# EAGLE board bugs (EAGLE 9.1.1)
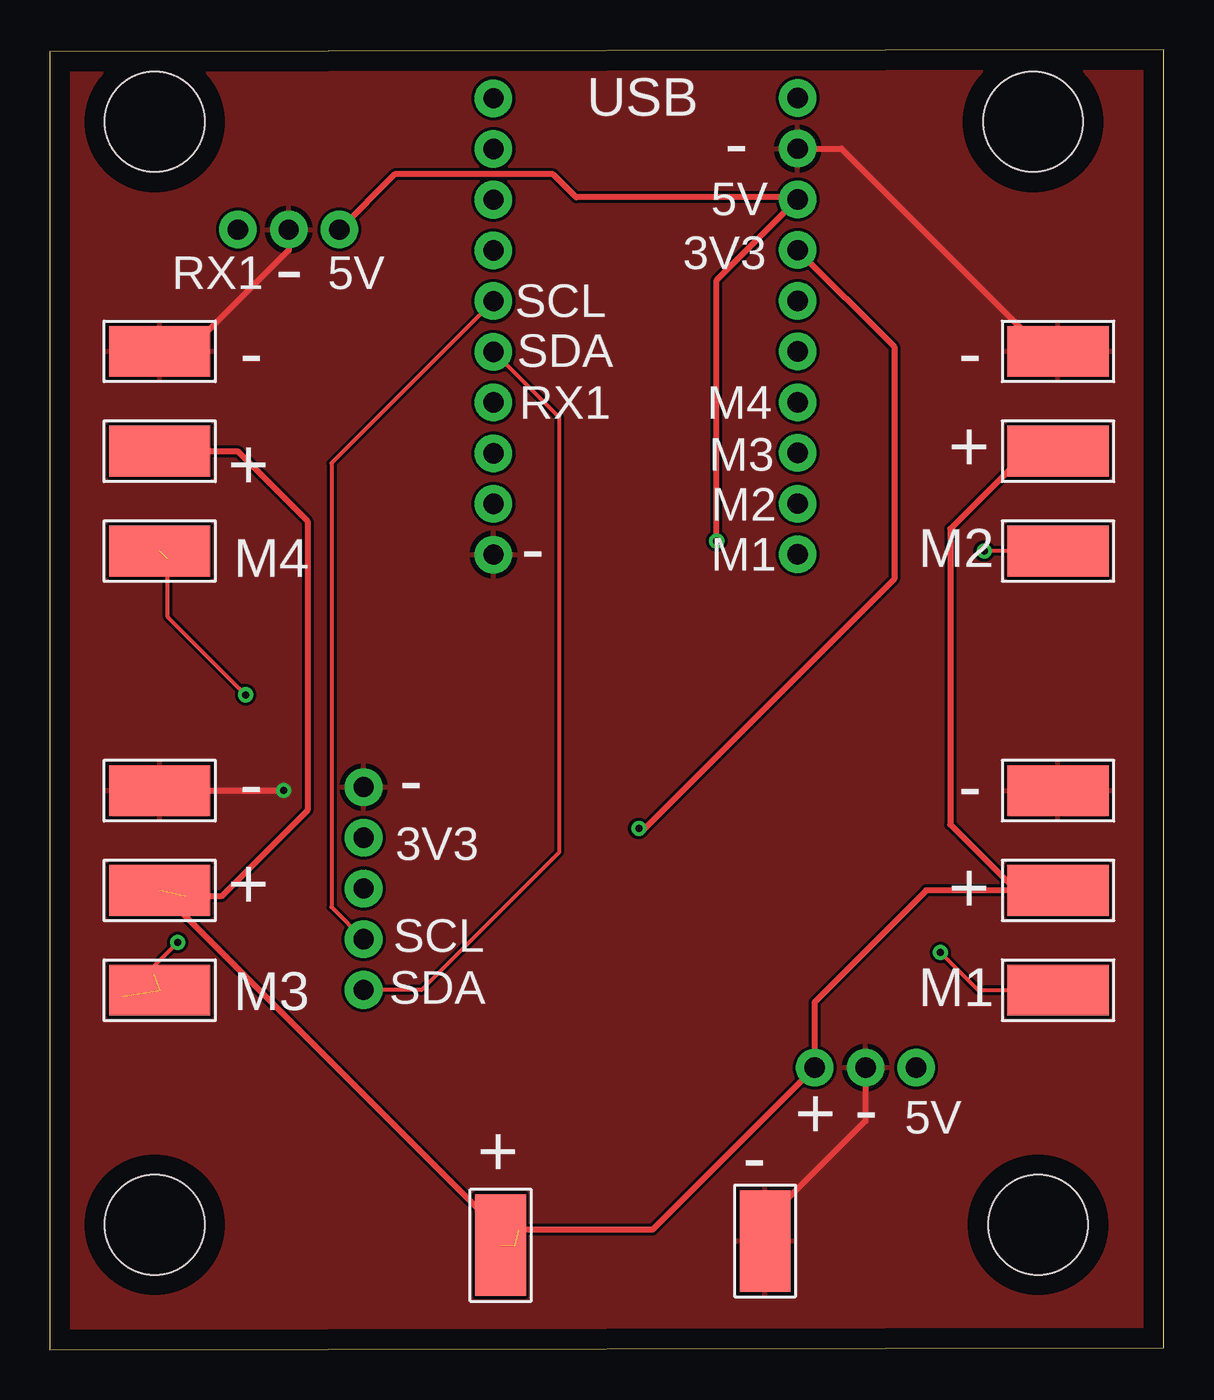
[diagram p0: board, top side]
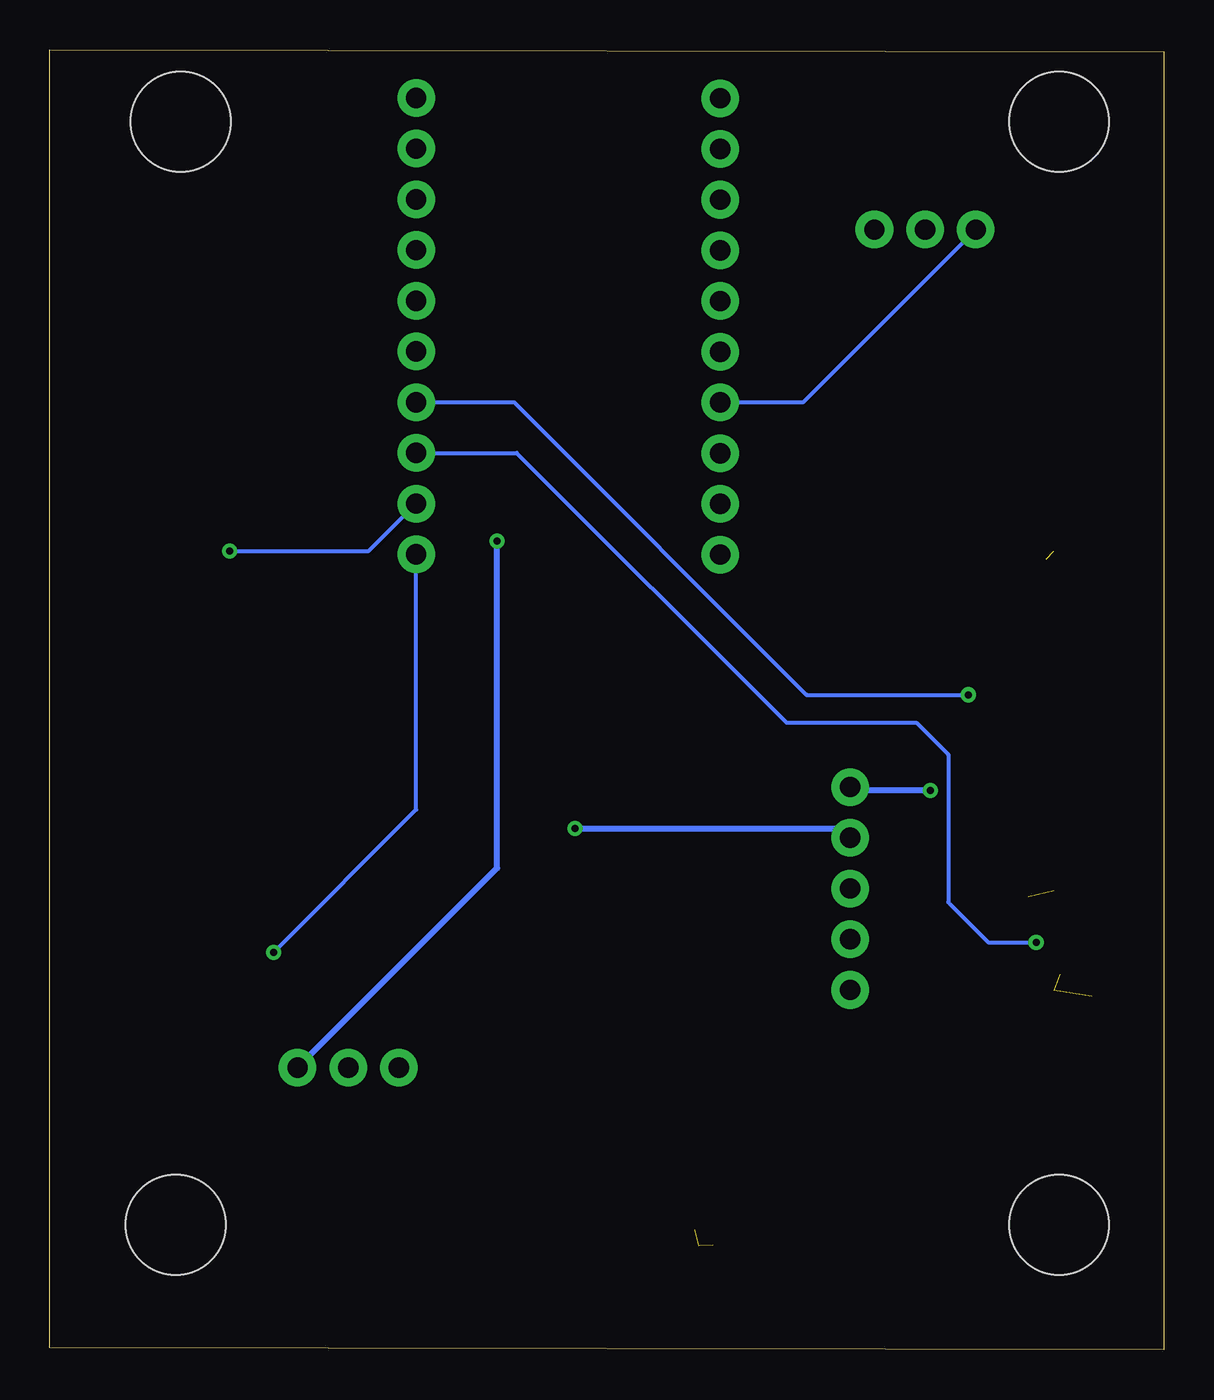
[diagram p1: board, bottom side, seen from below]

Size 55.8 x 65.1 mm. Coordinates in mm from the lower left corner, seen from the top.
Outline: 0,0 55.8,0.1 55.8,65.1 0,65 0,0
Copper layers (1*16): Top 0.035mm / dielectric 1.5mm / Bottom 0.035mm
Design rules "default": minimum track width 6mil, minimum drill 0.35mm, track to track 6mil, track to pad 6mil, pad to pad 6mil, via to via 6mil, smd to smd 6mil, copper to edge 40mil, drill to drill 6mil, minimum pad ring 10mil, minimum via ring 8mil, stop-mask expansion 4mil, vias tented up to drill 0mil, thermal gap 10mil
Holes 5 mm at 5.25,6.25 49.5,6.25 5.25,61.5 49.25,61.5

## Footprints (pad centres in the part's own frame; a part is rotated, then mirrored left to right if it is on the bottom)
5-2,5 = smd 2.54 x 5.08: 1 0,0
1X10_NO_SILK = drill 1.016 pad 1.88: 1 0,0; 2 2.54,0; 3 5.08,0; 4 7.62,0; 5 10.16,0; 6 12.7,0; 7 15.24,0; 8 17.78,0; 9 20.32,0; 10 22.86,0
1X03_NO_SILK = drill 1.016 pad 1.88: 1 0,0; 2 2.54,0; 3 5.08,0
1X05_NO_SILK = drill 1.016 pad 1.88: 1 0,0; 2 2.54,0; 3 5.08,0; 4 7.62,0; 5 10.16,0

## Placement (x,y rotation side)
GND  WIREPADSMD5-2,5  [5-2,5]  35.83,5.44 0 top
GND1  WIREPADSMD5-2,5  [5-2,5]  5.5,50 90 top
GND2  WIREPADSMD5-2,5  [5-2,5]  50.5,28 90 top
GND3  WIREPADSMD5-2,5  [5-2,5]  50.5,50 90 top
GND4  WIREPADSMD5-2,5  [5-2,5]  5.5,28 90 top
J1  [1X10_NO_SILK]  37.46,62.69 270 top
J2  [1X10_NO_SILK]  22.22,62.68 270 top
J3  [1X03_NO_SILK]  43.4,14.13 180 top
J4  [1X05_NO_SILK]  15.71,18.02 90 top
J5  [1X03_NO_SILK]  14.5,56.1 0 bottom
M1  WIREPADSMD5-2,5  [5-2,5]  50.5,18 90 top
M2  WIREPADSMD5-2,5  [5-2,5]  50.5,40 90 top
M3  WIREPADSMD5-2,5  [5-2,5]  5.5,18 90 top
M4  WIREPADSMD5-2,5  [5-2,5]  5.5,40 90 top
VBAT  WIREPADSMD5-2,5  [5-2,5]  22.58,5.23 0 top
VBAT1  WIREPADSMD5-2,5  [5-2,5]  5.5,45 90 top
VBAT2  WIREPADSMD5-2,5  [5-2,5]  50.5,23 90 top
VBAT3  WIREPADSMD5-2,5  [5-2,5]  50.5,45 90 top
VBAT4  WIREPADSMD5-2,5  [5-2,5]  5.5,23 90 top

## Library data of the parts
GND GND1-GND4 M1-M4 VBAT VBAT1-VBAT4 = wirepad
J1-J5 = SparkFun-Connectors

## Nets
3V3: J1.4 J4.4
5V: J1.3 J3.1 J5.1
GND: GND1.1 GND2.1 GND3.1 GND4.1 GND.1 J1.2 J2.10 J3.2 J4.5 J5.2
M1: J1.10 M1.1
M2: J1.9 M2.1
M3: J1.8 M3.1
M4: J1.7 M4.1
MISO: J2.2
MOSI: J2.1
RX1: J2.7 J5.3
SCK: J2.3
SCL: J2.5 J4.2
SDA: J2.6 J4.1
SS: J2.4
TX1: J2.8
VBAT: J3.3 VBAT1.1 VBAT2.1 VBAT3.1 VBAT4.1 VBAT.1

## Tracks (layer width: path | path; a pad name or v marks a point on that pad's centre or on a via)
3V3  (via drill 0.35)
  Top 0.152: 29.7,26 29.6,26 v29.5,26.1
  Top 0.305: J1.4 42.3,50.23 42.3,38.6 29.7,26
  Bottom 0.152: 16.18,26.1 J4.4
  Bottom 0.305: v29.5,26.1 16.18,26.1
5V  (via drill 0.35)
  Top 0.152: J1.3 37.36,57.71
  Top 0.305: v33.4,40.5 33.4,53.56 J1.3 | 37.36,57.71 26.36,57.71 25.2,58.87 17.27,58.87 J5.1
  Bottom 0.305: J3.1 33.4,24.12 v33.4,40.5
GND  (via drill 0.35)
  Top 0.152: GND1.1 6.9,50 7.4,50
  Top 0.305: GND4.1 v11.7,28 | J3.2 40.85,11.46 35.3,5.9 | J5.2 11.96,55.06 6.9,50 | 49.31,50.5 39.66,60.15 J1.2
  Bottom 0.152: 15.54,28 J4.5
  Bottom 0.305: v11.7,28 15.54,28
  pour Top: 0.75,65 55.9,65 55.9,-0.25 0.25,-0.25 0.25,65
M1  (via drill 0.35)
  Top 0.203: M1.1 46.5,18 v44.6,19.9
  Bottom 0.203: v44.6,19.9 37.46,27.04 J1.10
M2  (via drill 0.35)
  Top 0.152: 50.2,40.3 M2.1
  Top 0.203: M2.1 v46.8,40
  Bottom 0.203: v46.8,40 39.83,40 J1.9
M3  (via drill 0.35)  (2 unrouted)
  Top 0.152: 3.6,17.7 3.6,17.2 | 5.2,19.2 5.2,18.8
  Top 0.203: v6.4,20.4 5.2,19.2
  Bottom 0.152: 10.8,22.4 10.6,22.2
  Bottom 0.203: v6.4,20.4 8.8,20.4 10.6,22.2 10.7,22.3 | J1.8 32.41,44.91 18.9,31.4 12.4,31.4 10.8,29.8 10.8,22.4
M4  (via drill 0.35)  (1 unrouted)
  Top 0.203: v9.8,32.8 5.9,36.7 5.9,39.6
  Bottom 0.203: J1.7 32.55,47.45 17.9,32.8 v9.8,32.8
RX1
  Bottom 0.203: J5.3 18.08,47.44 J2.7
SCL
  Top 0.152: 15.76,20.6 J4.2
  Top 0.203: J2.5 14.1,44.4 14.1,22.17 J4.2
SDA
  Top 0.203: J2.6 25.5,46.7 25.5,24.9 18.62,18.02 J4.1
VBAT  (3 unrouted)
  Top 0.152: 23.3,5.2 23.3,4.5 | 38.3,14.11 37.99,13.81 | 48.4,23 49,23 | VBAT3.1 49,45
  Top 0.305: J3.3 37.99,13.81 30.19,6 23.5,6 | VBAT4.1 23.3,5.2 | VBAT1.1 9.4,45 12.9,41.5 12.9,27 8.6,22.7 6.8,22.7 | VBAT2.1 49,23 43.9,23 38.3,17.4 38.3,14.11 | 49,45 45.1,41.1 45.1,26.3 48.4,23

## Text on the board
tNames: USB | - | 5V | 3V3 | RX1 | - | - | 5V | SCL | - | SDA | - | RX1 | M4 | M3 | + | + | M2 | M4 | - | M1 | M2 | - | - | - | 3V3 | + | + | SCL | M3 | SDA | M1 | + | - | 5V | + | -